# Altium PCB 004-H-01.PcbDoc
Units mm, origin at the board's own origin, x right, y up, seen from the top; angles counter-clockwise.
Board outline 101 x 61 mm, 2 copper layers (Top Layer, Bottom Layer), stack 1.621 mm thick; 86 components, 64 nets, 305 pads, 146 vias.
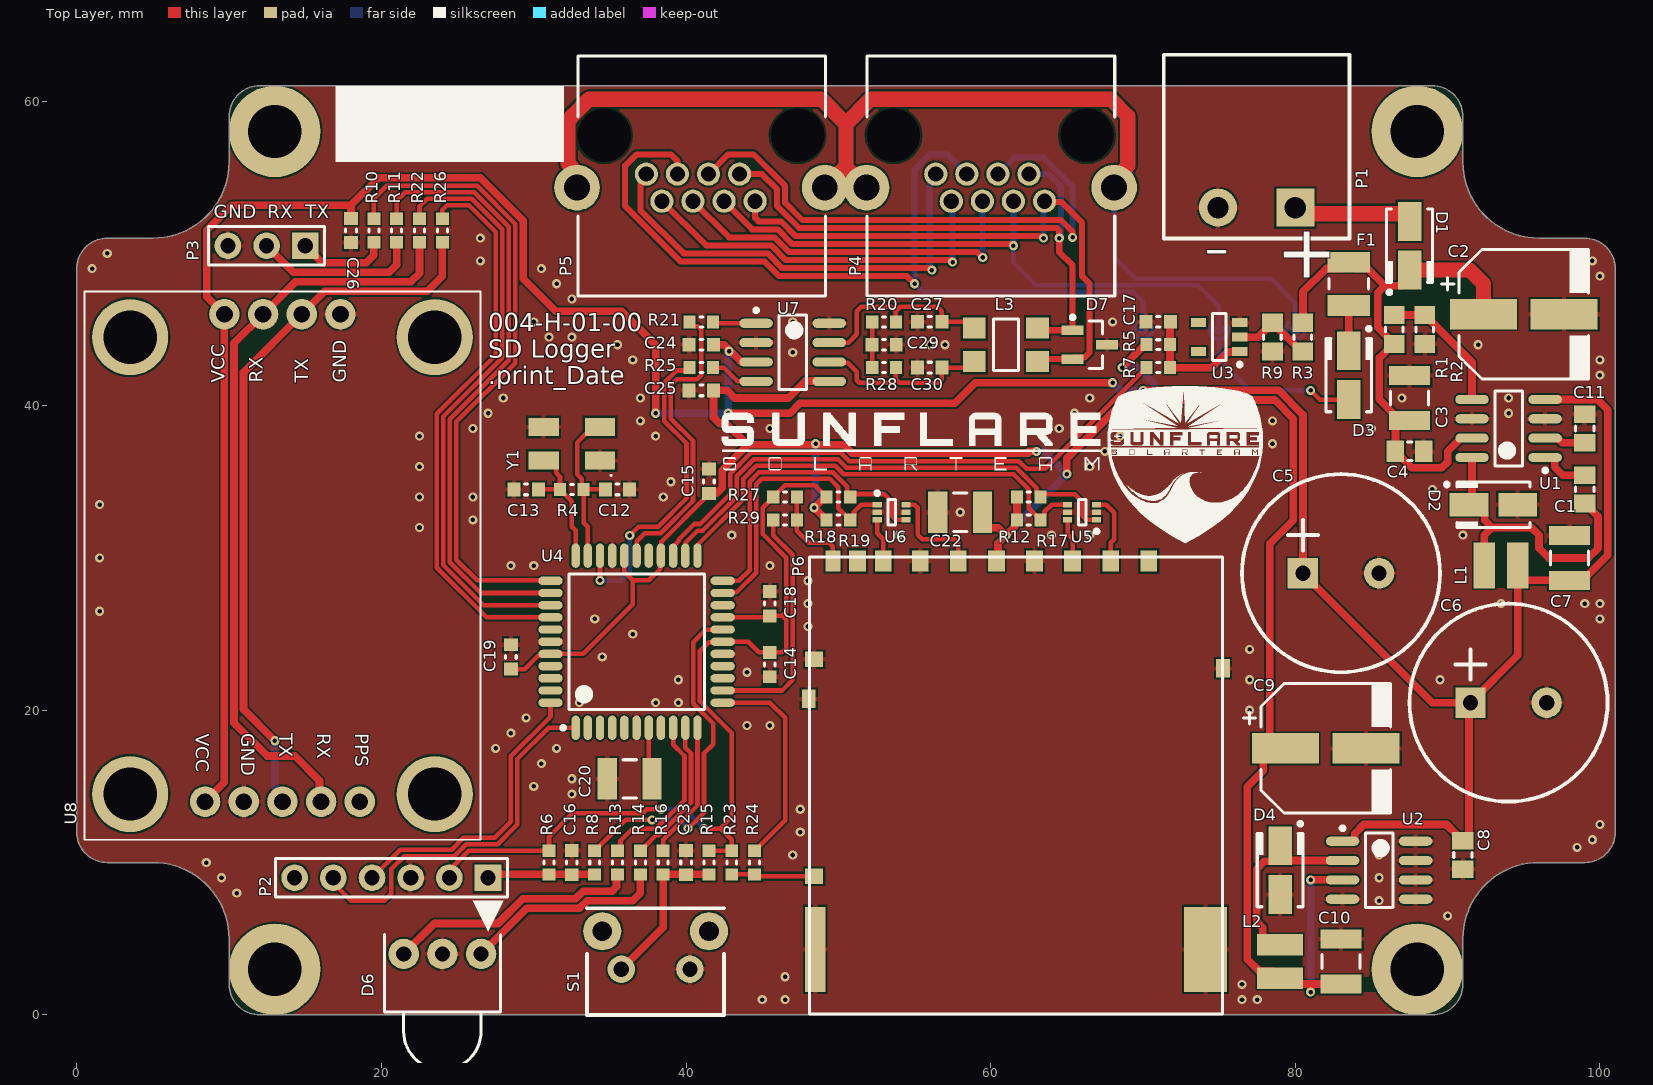
[diagram p0: Top Layer view]
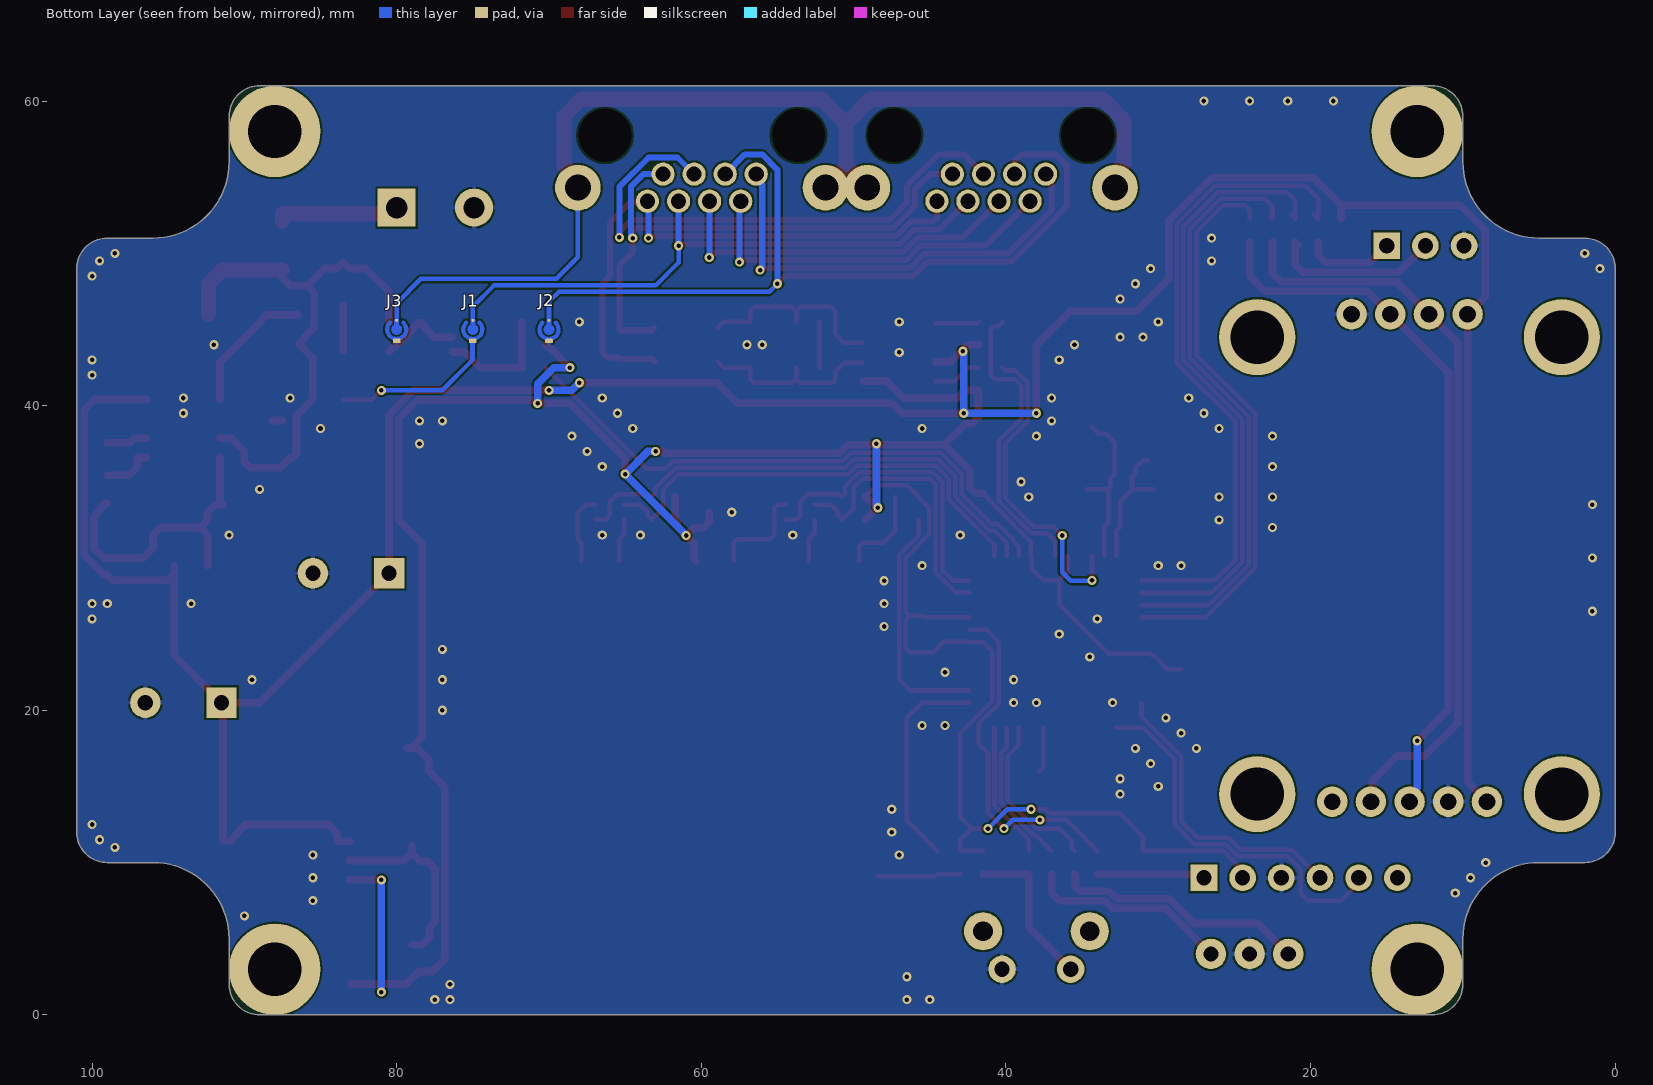
[diagram p1: Bottom Layer view, seen from below]

## Layer stack, top to bottom
Top Solder: solder mask 0.0102, Solder Resist, Dk 3.5
Top Layer: signal copper 0.0356
Dielectric 1: dielectric 1.55, FR-4, Dk 4.8
Bottom Layer: signal copper 0.0356
Bottom Solder: solder mask 0.0102, Solder Resist, Dk 3.5

## Board outline
5,10 cw(c5,5) 10,5 10,2 ccw(c12,2) 12,0 89,0 ccw(c89,2) 91,2 91,5 cw(c96,5) 96,10 99,10 ccw(c99,12) 101,12 101,49 ccw(c99,49) 99,51 96,51 cw(c96,56) 91,56 91,59 ccw(c89,59) 89,61 89,60.992 12.008,60.992 12,61 ccw(c12,59) 10,59 10,56 cw(c5,56) 5,51 2,51 ccw(c2,49) 0,49 0,12 ccw(c2,12) 2,10

## Design rules (kind name [scope] priority, off if disabled: settings)
Clearance [All] p1: gap=0.127 ignorepadtopadclearanceinfootprint=FALSE
HoleSize [All] p1: absolutevalues=TRUE maxlimit=6.3 minlimit=0.3 maxpercent=80.000 minpercent=20.000
MinimumSolderMaskSliver [All] p1: minsoldermaskwidth=0.127
PolygonConnect PolygonConnect_via [All vs IsVia] p1: connectstyle=Direct reliefconductorwidth=0.254 reliefentries=4 polygonreliefangle="90 Angle" airgapwidth=0.254
PolygonConnect [All] p2: connectstyle=Relief reliefconductorwidth=0.3 reliefentries=4 polygonreliefangle="90 Angle" airgapwidth=0.127
RoutingVias [All] p1: holewidth=0.3 width=0.6 viastyle="Through Hole" minholewidth=0.3 minwidth=0.6 maxholewidth=0.711 maxwidth=1.27
SilkToSilkClearance [All] p1 off: silktosilkclearance=0.254
SilkToSolderMaskClearance [IsPad] p1 off: minsilkscreentomaskgap=0.254 clearancetoexposedcopper=TRUE
SolderMaskExpansion [All] p1: expansion=0.102
UnRoutedNet [All] p1: checkbadconnections=TRUE
Width [All] p1: maxlimit=5 minlimit=0.127 preferedwidth=0.2
25 further rules are at their usual default settings.

## Components (designator, comment, footprint, x,y, rotation, side; value= is the part's Value field where it differs from the comment)
C1 "100nF" CAP0805 99,34.5 r90 top
C2 "68uF" CAPP8383X62N 95,46 r0 top
C3 "2.2uF" CAP1210 87.5,40.5 r270 top
C4 "100nF" CAP0805 87.5,37 r180 top
C5 "4700uF" CAPPOL_leaded_D12_5L20P5 83,29 r0 top
C6 "4700uF" CAPPOL_leaded_D12_5L20P5 94,20.5 r0 top
C7 "10uF" CAP1210 98,30 r270 top
C8 "100nF" CAP0805 91,10.5 r90 top
C9 "100uF" CAPP8383X62N 82,17.5 r0 top
C10 "10uF" CAP1210 83,3.5 r270 top
C11 "100nF" CAP0805 99,38.5 r270 top
C12 "33pF" CAP0603 35.5,34.5 r180 top
C13 "33pF" CAP0603 29.5,34.5 r0 top
C14 "100nF" CAP0603 45.5,23 r90 top
C15 "100nF" CAP0603 41.5,35.031 r270 top
C16 "100nF" CAP0603 32.5,10 r90 top
C17 "100nF" CAP0603 71,45.5 r180 top
C18 "100nF" CAP0603 45.5,27 r270 top
C19 "100nF" CAP0603 28.5,23.5 r270 top
C20 "10uF" CAP1210 36.3,15.5 r0 top
C22 "10uF" CAP1210 58,33 r0 top
C23 "100nF" CAP0603 40,10 r270 top
C24 "100nF" CAP0603 41,44 r0 top
C25 "100nF" CAP0603 41,41 r0 top
C26 "100nF" CAP0603 18,51.5 r90 top
C27 "47pF" CAP0603 56,45.5 r0 top
C29 "100nF" CAP0603 53,44 r180 top
C30 "47pF" CAP0603 56,42.5 r180 top
D1 "S2MA" DIODEDO-214AC 87.5,50.5 r90 top
D2 "HTA5U100" DIODEDO-214AC 93,33.5 r0 top
D3 "S2MA" DIODEDO-214AC 83.5,42 r270 top
D4 "HTA5U100" DIODEDO-214AC 79,9.5 r270 top
D6 "RG" LED_RG_COMMON_GND 24,4 r0 top
D7 "PESD1CAN" SOT23-3N 66.5,44 r0 top
F1 "PTC 250mA" Fuse1210 83.5,48 r90 top
J1 "Solder Jumper" SOLDERJUMER 75,45 r90 bottom
J2 "Solder Jumper" SOLDERJUMER 70,45 r90 bottom
J3 "Solder Jumper" SOLDERJUMER 80,45 r90 bottom
L1 "100uH" INDP3030X28N 93.5,29.5 r0 top
L2 "47uH" INDP3030X28N 79,3.5 r270 top
L3 "51uH" IND200P450X300-4N 61,44 r180 top
P1 "Header 2 way" 21.95MH/2-E 80,53 r180 top
P2 "Header 1X6" Header1X6P100 27,9 r180 top
P3 "Header 1X3" Header1X3P100 15,50.5 r180 top
P4 "Header 1X8 G" TECO-1-406541-5 60,63 r180 top
P5 "Header 1X8 G" TECO-1-406541-5 41,63 r180 top
P6 "SD Card" SDK-9BNS-K13-GS-TB 61,30.5 r0 top
R1 "100K" RES0805 86.5,45 r90 top
R2 "39K" RES0805 88.5,45 r270 top
R3 "105K" RES0805 80.5,44.5 r270 top
R4 "1M0" RES0603 32.5,34.5 r180 top
R5 "10K" RES0603 71,44 r0 top
R6 "10K" RES0603 31,10 r270 top
R7 "1K0" RES0603 71,42.5 r180 top
R8 "470R" RES0603 34,10 r270 top
R9 "13K3" RES0805 78.5,44.5 r270 top
R10 "1K0" RES0603 19.5,51.5 r270 top
R11 "1K0" RES0603 21,51.5 r270 top
R12 "10K" RES0603 62.5,34 r0 top
R13 "820R" RES0603 35.5,10 r270 top
R14 "820R" RES0603 37,10 r270 top
R15 "10K" RES0603 41.5,10 r270 top
R16 "1K0" RES0603 38.5,10 r270 top
R17 "10K" RES0603 62.5,32.5 r0 top
R18 "10K" RES0603 50,34 r0 top
R19 "10K" RES0603 50,32.5 r0 top
R20 "15K" RES0603 53,45.5 r180 top
R21 "470R" RES0603 41,45.5 r180 top
R22 "1K0" RES0603 22.5,51.5 r270 top
R23 "10K" RES0603 43,10 r270 top
R24 "1K0" RES0603 44.5,10 r90 top
R25 "470R" RES0603 41,42.5 r180 top
R26 "1K0" RES0603 24,51.5 r270 top
R27 "10K" RES0603 46.5,34 r0 top
R28 "15K" RES0603 53,42.5 r0 top
R29 "1K0" RES0603 46.5,32.5 r180 top
S1 "Switch" FSMRA4JH 38,3 r0 top
U1 "MAX5035B" SOIC-8N 94,38.5 r180 top
U2 "AP1509-33" SOIC-8N 85.5,9.5 r0 top
U3 "BU4809G" SOT95P280X125-5N 75,44.5 r180 top
U4 "DSPIC33EP128GS804" TQFP80P1200X1200X120-44N 36.75,24.5 r90 top
U5 "NUF2230XV6" SOT50P160X60-6N 66,33 r180 top
U6 "NUF2230XV6" SOT50P160X60-6N 53.5,33 r0 top
U7 "MCP2562" SOIC-8N 47,43.5 r0 top
U8 "GY-GPS6MV2" GY-GPS6MV2 13.5,47.5 r0 top
Y1 "16MHz" "CrystalSMD 5032" 32.5,37.5 r180 top

## Footprints (in the part's own frame and the unit in brackets; to place one, negate y for a bottom-side part, rotate by r counter-clockwise, add the part's x,y. Pads: shape width x height; smd on the part's side, far side on the other; paste and mask are expansions set on the pad)
21.95MH/2-E [mm] "Terminal Block, Horizontal, Header, 5.08 mm, 2 Ways"
  rect 2.5x2.5 hole 1.4: 1(0,0)
  round 2.5 hole 1.4: 2(5.08,0)
  silkscreen extent -3.56,-10.03 8.64,2.03, body extent -3.54,-10 8.62,2, height 8.6
CAP0603 [mm] "Chip Capacitor 0603"
  rect 0.85x0.9 smd: 1(-0.8,0) 2(0.8,0)
  silkscreen extent -0.1,-0.35 0.1,0.35, body extent -0.83,-0.43 0.82,0.42, height 0.6
CAP0805 [mm] "Chip Capacitor, 2-Leads, Body 2.0x1.3mm, IPC Medium Density"
  rect 1.15x1.4 smd: 1(-0.925,0) 2(0.925,0)
  silkscreen extent -0.15,-0.6 0.15,0.6, body extent -1.1,-0.67 1.1,0.67, height 0.95
CAP1210 [mm] "Chip Capacitor, 2-Leads, Body 3.2x2.5mm, IPC Medium Density"
  rect 1.25x2.7 smd: 1(-1.475,0) 2(1.475,0)
  silkscreen extent -0.45,-1.25 0.45,1.25, body extent -1.7,-1.35 1.7,1.35, height 1.3
CAPP8383X62N [mm] "Capacitor SMD, 2-Leads, Body 8.3x8.3mm, IPC Medium Density"
  rect 4.4x2 smd: 1(-2.65,0) 2(2.65,0)
  silkscreen extent -5.4,-4.25 4.25,4.25, body extent -4.25,-4.25 4.25,4.25, height 6.2
CAPPOL_leaded_D12_5L20P5 [mm]
  rect 2x2 hole 1: 1(-2.5,0)
  round 2 hole 1: 2(2.5,0)
  silkscreen extent -6.5,-6.5 6.5,6.5, body extent -6.25,-6.25 6.25,6.25, height 20
"CrystalSMD 5032" [mm] "DFN, 4-Leads, Body 3.20x5.00mm, Pitch 3.80mm, IPC Medium Density"
  rect 2x1.2 smd: 1(-1.85,-1.1) 2(1.85,-1.1) 3(1.85,1.1) 4(-1.85,1.1)
  silkscreen extent -2.63,2.03 -2.53,2.12, body extent -2.58,-1.68 2.57,1.68, height 0.4
DIODEDO-214AC [mm] "Molded Diode, 2-Leads, Body 4.4x2.7mm, IPC Medium Density"
  rect 2.55x1.55 smd: 1(-1.6,0) 2(1.6,0)
  silkscreen extent -3.17,-1.5 2.4,1.5, body extent -2.5,-1.48 2.5,1.48, height 2.4
FSMRA4JH [mm] "Tactile switch side actuated"
  round 2.5 hole 1.3: 0(-3.505,2.49) 0(3.505,2.49)
  round 1.8 hole 1: 1(-2.25,0) 2(2.25,0)
  silkscreen extent -4.5,-3 4.5,4, body extent -4.2,-8.36 4.2,4, height 7
Fuse1210 [mm]
  rect 1.35x2.8 smd: 1(-1.425,0) 2(1.425,0)
  silkscreen extent -0.35,-1.3 0.35,1.3, body extent -1.72,-1.4 1.71,1.4, height 0.85
GY-GPS6MV2 [mm] "GPS module"
  round 5 hole 3.5: 0(-10,-33) 0(-10,-3) 0(10,-33) 0(10,-3)
  round 2 hole 1.1: 1(-5.08,-33.5) 1(-3.81,-1.5) 2(-1.27,-1.5) 2(2.54,-33.5) 3(0,-33.5) 3(1.27,-1.5) 4(-2.54,-33.5) 4(3.81,-1.5) 5(5.08,-33.5)
  silkscreen extent -13,-36 13,0
Header1X3P100 [mm] "Header 1X3, 100mil pitch"
  rect 1.75x1.75 hole 1: 1(0,0)
  round 1.75 hole 1: 2(2.54,0) 3(5.08,0)
  silkscreen extent -1.27,-1.27 6.35,1.27, body extent -1.27,-1.27 6.35,1.27, height 9
Header1X6P100 [mm] "Header 1X6, 100mil pitch"
  rect 1.75x1.75 hole 1: 1(0,0)
  round 1.75 hole 1: 2(2.54,0) 3(5.08,0) 4(7.62,0) 5(10.16,0) 6(12.7,0)
  silkscreen extent -1.27,-1.27 13.97,1.27, body extent -1.27,-1.27 13.97,1.27, height 9
IND200P450X300-4N [mm] "IND, 4-Leads, Body 3.4x4.7mm (max), Pitch 2.00mm, IPC Medium Density"
  rect 1.5x1.4 smd: 1(-2.075,1.1) 2(2.075,1.1) 3(2.075,-1.1) 4(-2.075,-1.1)
  silkscreen extent -0.82,-1.7 0.82,1.7, body extent -2.35,-1.7 2.35,1.7, height 3
INDP3030X28N [mm] "Precision Wire Wound Inductor, 2-Leads, Body 3,00x3,00mm, IPC Medium Density"
  rect 1.4x3 smd: 1(-1.1,0) 2(1.1,0)
  body extent -1.5,-1.49 1.5,1.49, height 3
LED_RG_COMMON_GND [mm]
  round 2 hole 1: 1(-2.54,0) 2(0,0) 3(2.54,0)
  silkscreen extent -3.81,-7.62 3.81,1.27
RES0603 [mm] "Chip Resistor 0603"
  rect 0.8x0.85 smd: 1(-0.775,0) 2(0.775,0)
  silkscreen extent -0.1,-0.33 0.1,0.33, body extent -0.82,-0.43 0.82,0.43, height 0.6
RES0805 [mm] "Chip Resistor, 2-Leads, Body 2.0x1.3mm, IPC Medium Density"
  rect 1.2x1.35 smd: 1(-0.95,0) 2(0.95,0)
  silkscreen extent -0.15,-0.58 0.15,0.58, body extent -1.1,-0.67 1.1,0.67, height 0.7
SDK-9BNS-K13-GS-TB [mm] "Memory Socket SD card"
  rect 1.1x1.4 smd: 1(6.875,-0.7) 2(4.375,-0.7) 3(1.875,-0.7) 4(-0.625,-0.7) 5(-3.125,-0.7) 6(-5.625,-0.7) 7(-8.05,-0.7) 8(-9.75,-0.7) 9(9.375,-0.7)
  rect 1x1.4 smd: 10(-11.355,-0.7)
  rect 1.2x1 smd: 11(-12.595,-21.4) 12(-12.595,-7.15)
  rect 0.9x1.2 smd: 12(-12.945,-9.75) 12(14.255,-7.75)
  rect 1.35x5.6 smd: 12(-12.52,-26.2)
  rect 2.8x5.6 smd: 12(13.105,-26.2)
  silkscreen extent -12.9,-30.45 14.21,-0.45, body extent -12.85,-30.4 14.25,-0.4, height 2.95
SOIC-8N [mm] "SOIC, 8-Leads, Body 4.9x3.9mm (max), Pitch 1.27mm, IPC Medium Density"
  oval 2.2x0.6 smd: 1(-2.4,1.905) 2(-2.4,0.635) 3(-2.4,-0.635) 4(-2.4,-1.905) 5(2.4,-1.905) 6(2.4,-0.635) 7(2.4,0.635) 8(2.4,1.905)
  silkscreen extent -2.53,-2.45 0.9,2.88, body extent -3,-2.45 3,2.45, height 1.75
SOLDERJUMER [mm] "Solder jumper open"
  round 0.2 smd paste+0 mask+0: 1(0.6,0)
  rrect50% 0.3x0.5 smd paste+0 mask+0: 2(-0.75,0)
  Top Layer region: 0.316,-0.15 0.208,-0.281 0.051,-0.346 -0.118,-0.329 -0.259,-0.235 -0.34,-0.085 -0.34,0.085 -0.259,0.235 -0.118,0.329 0.051,0.346 0.208,0.281 0.316,0.15 0.316,0.15 0.316,0.15 0.6,0.15 0.665,0.135 0.717,0.094 0.746,0.033 0.746,-0.033 0.717,-0.094 0.665,-0.135 0.6,-0.15 0.6,-0.15
  Top Layer region: 0.53,-0.53 0.232,-0.713 -0.117,-0.741 -0.441,-0.607 -0.668,-0.34 -0.75,0 -0.668,0.34 -0.441,0.607 -0.117,0.741 0.232,0.713 0.53,0.53 0.53,0.53 0.56,0.483 0.566,0.428 0.548,0.375 0.508,0.336 0.456,0.318 0.401,0.324 0.354,0.354 0.354,0.354 0.155,0.476 -0.078,0.494 -0.294,0.405 -0.446,0.227 -0.5,0 -0.446,-0.227 -0.294,-0.405 -0.078,-0.494 0.155,-0.476 0.354,-0.354 0.354,-0.354 0.401,-0.324 0.456,-0.318 0.508,-0.336 0.548,-0.375 0.566,-0.428 0.56,-0.483 0.53,-0.53
SOT23-3N [mm] "SOT23, 3-Leads, Body 3.1x3.0mm (max), Pitch 0.95mm, IPC Medium Density"
  rect 1.45x0.6 smd: 1(-1.125,0.95) 2(-1.125,-0.95) 3(1.125,0)
  silkscreen extent -1.25,-1.55 0.85,1.92, body extent -1.25,-1.55 1.25,1.55, height 1.45
SOT50P160X60-6N [mm] "SOT23, 6-Leads, Body 1.60x1.60mm, Pitch 0.50mm, IPC Medium Density"
  rect 0.6x0.35 smd: 1(-0.95,0.5) 2(-0.95,0) 3(-0.95,-0.5) 4(0.95,-0.5) 5(0.95,0) 6(0.95,0.5)
  silkscreen extent -1.08,-0.85 0.25,1.37, body extent -0.65,-0.85 0.65,0.85, height 0.6
SOT95P280X125-5N [mm] "SOT23, 5-Leads, Body 2.90x2.80mm, Pitch 0.95mm, IPC Medium Density"
  rect 1x0.6 smd: 1(-1.35,0.95) 2(-1.35,0) 3(-1.35,-0.95) 4(1.35,-0.95) 5(1.35,0.95)
  silkscreen extent -1.48,-1.55 0.45,1.92, body extent -0.85,-1.55 0.85,1.55, height 1.25
TECO-1-406541-5 [mm] "MODULAR, JACK, THT, R/A, RJ45, 8P8C"
  round 0 hole 3.5 unplated: 0(-6.323,5.258) 0(6.377,5.258)
  round 1.524 hole 1: 1(3.607,7.798) 2(2.587,9.578) 3(1.567,7.798) 4(0.547,9.578) 5(-0.473,7.798) 6(-1.493,9.578) 7(-2.513,7.798) 8(-3.533,9.578)
  round 3 hole 1.7: 9(-8.103,8.688) 9(8.157,8.688)
  silkscreen extent -8.14,0.05 8.11,15.8, body extent -8.13,0 8.13,15.75, height 13.4
TQFP80P1200X1200X120-44N [mm] "TQFP, 44-Leads, Body 12.0x12.0mm (max), Pitch 0.80mm, IPC Medium Density"
  oval 1.6x0.55 smd: 1(-5.65,4) 2(-5.65,3.2) 3(-5.65,2.4) 4(-5.65,1.6) 5(-5.65,0.8) 6(-5.65,0) 7(-5.65,-0.8) 8(-5.65,-1.6) 9(-5.65,-2.4) 10(-5.65,-3.2) 11(-5.65,-4) 23(5.65,-4) 24(5.65,-3.2) 25(5.65,-2.4) 26(5.65,-1.6) 27(5.65,-0.8) 28(5.65,0) 29(5.65,0.8) 30(5.65,1.6) 31(5.65,2.4) 32(5.65,3.2) 33(5.65,4)
  oval 0.55x1.6 smd: 12(-4,-5.65) 13(-3.2,-5.65) 14(-2.4,-5.65) 15(-1.6,-5.65) 16(-0.8,-5.65) 17(0,-5.65) 18(0.8,-5.65) 19(1.6,-5.65) 20(2.4,-5.65) 21(3.2,-5.65) 22(4,-5.65) 34(4,5.65) 35(3.2,5.65) 36(2.4,5.65) 37(1.6,5.65) 38(0.8,5.65) 39(0,5.65) 40(-0.8,5.65) 41(-1.6,5.65) 42(-2.4,5.65) 43(-3.2,5.65) 44(-4,5.65)
  silkscreen extent -5.77,-4.45 4.45,4.95, body extent -5,-5 5,5, height 1.2

## Part data
C1 C4 C8 C11: library part Capacitor, "Capacitor", Dielectric=X7R, Manufacturer=-, VoltageRating=100V, Farnell Ordercode=-, Manufacturer Part No=-, Price=0.00
C2: library part CapacitorPol, "Capacitor Pol", Dielectric=ELCO, Manufacturer=Panasonic, Manufacturer Part No=EEEFK1J680UP, VoltageRating=63V, Farnell Ordercode=1850126, Price=0.70
C3: library part Capacitor, "Capacitor", Dielectric=X7R, Manufacturer=AVX, Manufacturer Part No=C1210X225K1RACTU, VoltageRating=100V, Farnell Ordercode=2820988, Price=0.98
C5 C6: library part CapacitorPol, "Capacitor Pol", Dielectric=ELCO, Manufacturer=Panasonic, Manufacturer Part No=ECA0JM472, VoltageRating=6.3V, Farnell Ordercode=1848486, Price=0.73
C7 C10 C20 C22: library part Capacitor, "Capacitor", Dielectric=X5R, Manufacturer=Multicomp, Manufacturer Part No=MC1210X106K160CT, VoltageRating=16V, Farnell Ordercode=1759465, Price=0.50
C9: library part CapacitorPol, "Capacitor Pol", Dielectric=ELCO, Manufacturer=Panasonic, Manufacturer Part No=EEEHA1A101P, VoltageRating=10V, Farnell Ordercode=1973295, Price=0.11
C12 C13: library part Capacitor, "Capacitor", Dielectric=C0G, Manufacturer=-, VoltageRating=100V, Farnell Ordercode=-, Manufacturer Part No=-, Price=0.00
C14 C15 C17 C18 C19 C23 C24 C25 C26 C29: library part Capacitor, "Capacitor", Dielectric=X7R, Manufacturer=-, VoltageRating=50V, Farnell Ordercode=-, Manufacturer Part No=-, Price=0.00
C16: library part Capacitor, "Capacitor", Dielectric=X7R, Manufacturer=-, VoltageRating=16V, Farnell Ordercode=-, Manufacturer Part No=-, Price=0.00
C27 C30: library part Capacitor, "Capacitor", Dielectric=C0G, Manufacturer=-, VoltageRating=50V, Farnell Ordercode=-, Manufacturer Part No=-, Price=0.00
D1 D3: library part Diode, "Diode", Manufacturer=Multicomp, Farnell Ordercode=2675071, Manufacturer Part No=S2MA, Price=0.13
D2 D4: library part "Diode Schottky", "Diode Schottky", Manufacturer=Multicomp, Farnell Ordercode=2750942, Manufacturer Part No=HTA5U100, Price=0.46
D6: library part Led_RG_Common_GND, "Led RG", Manufacturer=Multicomp, Manufacturer Part No=MCL039PURGW, Farnell Ordercode=1581194, Price=0.21
D7: "ESD Protection Device, TVS, 70 V, SOT-23, 3 Pins", Manufacturer=NXP, Farnell Ordercode=1510703, Manufacturer Part No=PESD1CAN, Price=0.13
F1: library part Fuse, "Fuse", Manufacturer="Bel Fuse", Manufacturer Part No=0ZCH0010FF2E, Farnell Ordercode=2834897, Price=0.15
J1 J2 J3: library part SolderJumper, "Solder jumper open", Manufacturer=-, Farnell Ordercode=-, Manufacturer Part No=-, Price=0.00
L1: library part Inductor, "Inductor", Manufacturer=BOURNS, Manufacturer Part No=SDR0302-101KL, Farnell Ordercode=2212477, Price=0.408
L2: library part Inductor, "Inductor", Manufacturer=Bourns, Manufacturer Part No=SDR0302-470KL, Farnell Ordercode=2328694, Price=0.403
L3: library part "Choke Common Mode", "Choke common mode", Manufacturer=Bourns, Manufacturer Part No=SRF4532-510Y, Farnell Ordercode=2859108, Price=0.47
P1: library part Header1X2, Manufacturer="IMO PRECISION CONTROLS", Manufacturer Part No=21.95MH/2-E, Farnell Ordercode=2517885, Price=0.153
P2: library part Header1X6, "Connector 1X6", Manufacturer=Multicomp, Manufacturer Part No=2211S-06G, Farnell Ordercode=1593415, Price=0.04
P3: library part Header1X3, "Connector 1X3", Manufacturer=Multicomp, Manufacturer Part No=2211S-03G, Farnell Ordercode=1593412, Price=0.02
P4 P5: library part Header1X8+G, "Connector 1X8 with Ground", Manufacturer="TE CONNECTIVITY", Manufacturer Part No=1-406541-5, Farnell Ordercode=-, Price=0.00
P6: library part "SD slot", "SD slot connector with card detect and protect", Manufacturer=JST, Manufacturer Part No=SDK-9BNS-K13-GS-TB, Farnell Ordercode=2469853, Price=1.46
R1 R2 R3 R4 R5 R6 R7 R8 R9 R10 R11 R12 R13 R14 R15 R16 R17 R18 R19 R20 R21 R22 R23 R24 R25 R26 R27 R28 R29: library part Resistor, "Resistor", Manufacturer=-, Tolerance=1%, Farnell Ordercode=-, Manufacturer Part No=-, Price=0.00
S1: library part TactileSwitch, "Tactile Switch", Manufacturer=1555988, Manufacturer Part No=FSMRA4JH, Farnell Ordercode="TE CONNECTIVITY", Price=0.14
U1: "5V 1A, 76V, High-Efficiency MAXPower Step-Down DC-DC Converter", Manufacturer="Maxim Integrated Products", Manufacturer Part No=MAX5035BUSA+T, Farnell Ordercode=2799102, Price=3.26
U2: "150KHz, 2A PWM BUCK DC/DC CONVERTER", Manufacturer="Diodes Inc", Manufacturer Part No=AP1509-33SG-13, Farnell Ordercode=1825322, Price=0.75
U3: library part BD48xx, "Voltage Detector", Manufacturer=ROHM, Manufacturer Part No=BU4809G-TR, Farnell Ordercode=2342983, Price=0.12
U4: "16-Bit Digital Signal Controllers fo  r Digital Power Applications with   Interconnected High-Speed PWM, ADC, PGA and Comparators", Manufacturer=Microchip, Manufacturer Part No=DSPIC33EP128GS804-I/PT, Farnell Ordercode=2706170, Price=4.44
U5 U6: "2 Line EMI Filter with ESDProtection", Manufacturer="ON SEMICONDUCTOR", Manufacturer Part No=NUF2230XV6T1G, Farnell Ordercode=2774598, Price=0.22
U7: "CAN Bus, Transceiver, CAN, LIN, 1, 1, 4.5 V, 5.5 V, SOIC", Manufacturer=Microchip, Manufacturer Part No=MCP2562-E/SN, Farnell Ordercode=2362839, Price=0.79
U8: "GPS module", Manufacturer=Ebay, Manufacturer Part No=GY-NEO6MV2, Farnell Ordercode=-, Price=5.00
Y1: library part Crystal_1, "Crystal", Manufacturer=MULTICOMP, Manufacturer Part No=MCSJK-7I-16.00-18-30-60-B-30, Farnell Ordercode=2854045, Price=0.27

## Free pads (board coordinates)
  round 6 hole 3.5: 0(13,3) 0(13,58) 0(88,3) 0(88,58)

## Via types
v1: diameter 0.6, hole 0.3, Top Layer to Bottom Layer, tented both sides, 146 vias

## Nets (pads, with @x,y where several pads share a name; then routed paths per layer and width w, separated by ;. In a path a pad name is that pad's centre, name@x,y a point inside that pad or via, vN(x,y) a via of type N, cw(c..) or ccw(c..) an arc to the next point about the centre after c; other vN are vias at no path point)
3.3V: C9.1 C10.2 C14.2 C15.2 C18.2 C19.2 C22.2 C25.2 L2.2 P2.2 P6.4 R5.1 R6.1 R12.1 R15.1 R17.1 R18.1 R19.1 R23.1 R27.1 U2.3 U4.17 U4.19 U4.26 U4.29 U4.40 U7.5 | length 221.7
  Top Layer w0.3: P2.2@24.46,9.5 25.735,10.775 R6.1 31,11.7 32.533,13.233 37.158,13.233 37.425,13.5 v1(38.342,13.5) ; C19.2 29.4,22.7 30.275,23.575 30.382,23.575 30.507,23.7 U4.40 33.24,23.7 36.5,26.96 36.5,28.525 ; U4.29 35.95,29.075 36.5,28.525 ; v1(41.177,12.229) 42.229,12.229 ; R15.1 R23.1 43,11.5 42.271,12.229 42.229,12.229 ; C15.2 41.475,34.231 41.2,33.956 41.2,33.882 38.384,31.066 38.384,30.184 U4.26 38.302,30.102 38.302,29.275 37.552,28.525 36.5,28.525 ; U4.19 45.4,26.1 C18.2 46.325,26.2 ; R18.1 49.225,34.025 48.975,34.275 48.95,34.275 48.453,34.772 46.497,34.772 46,34.275 45.975,34.275 45.725,34.025 R27.1 45.725,33.975 45.475,33.725 45.45,33.725 45.027,33.302 45.027,31.569 46.573,30.023 46.573,26.448 46.325,26.2 ; 42.229,12.229 43,13 43,18.51 40.902,20.608 40.902,23.879 41.486,24.463 42.363,24.463 U4.17 44.075,24.5 44.775,23.8 C14.2 46.324,23.8 46.573,24.049 46.573,25.952 46.325,26.2
  Top Layer w0.5: C15.2 41.519,34.25 42,34.25 42.365,34.615 42.365,35.758 44.041,37.434 ; C25.2@41.8,40.975 41.8,39.223 42.2,38.823 42.652,38.823 44.041,37.434 ; C25.2 42.697,41 43.197,40.5 46.7,40.5 47.814,41.614 49.381,41.614 U7.5 ; v1(48.5,37.5) 48.473,37.5 v1@48.407,37.434 ; R19.1 49.225,32.525 49.075,32.675 49.05,32.675 48.425,33.3 v1(48.405,33.3) 48.93,33.825 49.075,33.825 49.225,33.975 R18.1 ; C22.2 59.475,32.357 59.85,31.982 60.493,31.982 v1(61,31.475) ; P6.4 60.482,29.907 60.482,30.957 v1(61,31.475) ; R12.1 R17.1 61.575,32.35 61.575,32.05 v1(61,31.475) ; 62.477,36.881 62.381,36.881 ; v1(63,37) 62.5,37 62.381,36.881 ; v1(65,35.5) 65,36.53 68.62,40.15 v1(70.75,40.15) 70.973,40.373 78.64,40.373 79.873,39.14 79.873,32.475 78.32,30.922 78.32,18.25 C9.1@79.07,17.5 ; v1(68.625,42.5) 69.95,43.825 70.075,43.825 70.225,43.975 R5.1 ; C9.1 C9.1@79.07,17.5 ; v1(81,1.5) 81,2.025 ; v1(81,8.865) U2.3 ; C10.2 81,2.025 ; 44.041,37.434 v1@48.407,37.434 ; v1@48.407,37.434 50.372,37.434 50.925,36.881 62.381,36.881 ; C9.1@79.07,17.5 78.643,17.5 77.893,16.75 77.893,16.043 76.837,14.987 76.837,3.663 77.65,2.85 78.55,2.85 L2.2 79.375,2.025 81,2.025
  Bottom Layer w0.3: v1(38.342,13.5) 39.906,13.5 v1(41.177,12.229)
  Bottom Layer w0.5: v1(48.405,33.3) 48.5,33.395 v1(48.5,37.5) ; v1(61,31.475) 61,31.5 v1(65,35.5) 63.5,37 v1(63,37) ; v1(68.625,42.5) 69.675,42.5 70.75,41.425 v1(70.75,40.15) ; v1(81,1.5) v1(81,8.865)
5V: C5.1 C6.1 C7.2 C8.2 C24.2 C26.2 L1.2 U1.4 U2.1 U7.3 U8.1 | length 207.6
  Top Layer w0.5: U8.1@8.42,14 9.69,15.27 9.69,46 8.536,47.154 8.536,51.5 10.182,53.146 18,53.146 ; C26.2 18,53.146 ; v1(38,39.5) 38,43.98 35.774,46.206 31.444,46.206 29.308,48.342 29.308,52.145 26.499,54.954 19.808,54.954 18,53.146 ; C24.2 42.493,44 43.609,42.884 44.581,42.884 U7.3 ; v1(42.771,39.5) 46.825,39.5 47.475,40.15 57.65,40.15 59,41.5 v1(68,41.5) ; v1(70,41) 78.9,41 80.5,39.4 C5.1 89,20.5 C6.1 ; U2.1 83.849,11.405 83.895,11.451 83.895,11.895 84.5,12.5 89.925,12.5 90.55,11.875 90.55,11.75 90.875,11.425 C8.2 91.4,11.425 91.4,20.4 C6.1 ; L1.2 L1.2@94.6,28.975 ; U1.4 99.828,40.405 100.5,39.733 100.5,30.172 99.228,28.9 99.018,28.9 98.643,28.525 C7.2 95.05,28.525 L1.2@94.6,28.975 ; C6.1 94.6,23.6 L1.2@94.6,28.975
  Bottom Layer w0.5: v1(38,39.5) v1(42.771,39.5) 42.771,43.517 v1(42.829,43.575) ; v1(68,41.5) 68.5,41 v1(70,41)
CAN_+: J1.1 P4.6 P5.6 | length 39.8
  Top Layer w0.4: P5.6 44.342,51.573 46.014,51.573 46.979,50.608 61.385,50.608 v1(61.493,50.5)
  Bottom Layer w0.3: v1(61.493,50.5) 61.493,49.398 63,47.891 73.609,47.891 75,46.5 J1.1
  Bottom Layer w0.4: v1(61.493,50.5) P4.6
CAN_-: J2.1 P4.3 P5.3 | length 57.2
  Top Layer w0.4: P5.3 39.433,56.067 39,56.5 36.75,56.5 36,55.75 36,53.097 39.632,49.465 45.141,49.465 46.106,48.5 54.5,48.5 v1(55,48)
  Bottom Layer w0.3: v1(55,48) 55.536,47.464 69.369,47.464 70,46.834 J2.1
  Bottom Layer w0.4: v1(55,48) 55,55.5 56,56.5 57.135,56.5 P4.3
CAN_H: D7.1 L3.4 P4.7 P5.7 | length 38.3
  Top Layer w0.4: P5.7 44.98,55.202 45.973,54.209 45.973,53.105 47.416,51.662 64.338,51.662 64.5,51.5 v1(64.5,51) 64.5,50.081 65.375,49.206 D7.1 63.225,44.95 L3.4
  Bottom Layer w0.4: P4.7 63.798,55.202 64.622,54.378 64.622,51.122 v1(64.5,51)
CAN_L: D7.2 L3.1 P4.8 P5.8 | length 38.5
  Top Layer w0.4: P5.8 44.533,52.334 44.767,52.1 46.233,52.1 47.198,51.135 63.334,51.135 v1(63.469,51) ; L3.1 63.225,43.05 D7.2 65.475,43.15 66.15,43.15 66.5,43.5 66.5,48 66,48.5 66,50.782 66.002,50.784 66.002,51.306 66,51.308 66,52 64.619,53.381 63.574,53.381 P4.8
  Bottom Layer w0.4: v1(63.469,51) 63.469,53.358 P4.8
CAN_RX: R25.2 U4.31 | length 21.2
  Top Layer w0.3: v1(34.35,28.525) U4.31 ; v1(36.3,31.475) 36.88,32.055 38.165,32.055 40.026,33.916 40.026,37.52 38.573,38.973 38.573,39.257 38.577,39.261 38.577,39.739 38.573,39.743 38.573,41.501 39.379,42.307 40.032,42.307 R25.2
  Bottom Layer w0.3: v1(34.35,28.525) 34.375,28.5 35.75,28.5 36.3,29.05 v1(36.3,31.475)
CAN_SHIELD: J3.1 P4.9 P5.9 | length 74.2
  Top Layer w1: P5.9@32.843,54.312 32.46,54.695 32.46,55.684 32.246,55.898 32.246,58.727 32.5,58.981 32.5,59 33.619,60.119 48.881,60.119 50.5,58.5 ; P5.9@49.103,54.312 50.322,55.531 ; 50.473,55.682 50.775,55.38 50.775,55.078 51.541,54.312 P4.9@51.843,54.312 ; 50.5,55.898 50.5,58.5 ; P4.9@68.103,54.312 68.103,54.853 69,55.75 69,59 67.881,60.119 52.119,60.119 50.5,58.5
  Bottom Layer w0.3: P4.9@68.103,54.312 68.103,49.747 69.532,48.318 78.415,48.318 80,46.734 J3.1
CAN_TX: R21.2 U4.28 | length 20.2
  Top Layer w0.3: U4.28 36.75,31.103 37.275,31.628 38.342,31.628 40.453,33.739 40.453,37.697 39.004,39.146 39.004,39.916 39,39.92 39,41.324 39.403,41.727 40.727,41.727 41,42 41,45 40.775,45.225 40.475,45.225 40.225,45.475 R21.2
DEBUG_RX: R11.1 U4.35 | length 41.1
  Top Layer w0.3: R11.1@21.275,52.525 21.025,52.275 R11.1 21,53.447 21.553,54 26.104,54 28.354,51.75 28.354,42.971 24.491,39.107 24.491,29.717 26.508,27.7 U4.35
DEBUG_TX: R10.1 U4.34 | length 42.8
  Top Layer w0.3: R10.1@19.775,52.525 19.525,52.275 R10.1 19.487,52.288 19.487,53.573 20.341,54.427 26.281,54.427 28.781,51.927 28.781,42.794 24.918,38.931 24.918,29.894 26.287,28.525 31.075,28.525 U4.34
GND: C2.2 C3.1 C4.1 C5.2 C6.2 C7.1 C8.1 C9.2 C10.1 C11.1 C12.1 C13.1 C14.1 C15.1 C16.2 C17.2 C18.1 C19.1 C20.1 C22.1 C23.1 C24.1 C25.1 C26.1 C27.1 C29.1 C30.2 D2.2 D4.2 D6.2 D7.3 J2.2 J3.2 P1.2 P2.3 P3.3 P6.3 P6.6 P6.12 R2.2 R9.2 S1.2 U1.3 U1.6 U2.4 U2.5 U2.6 U2.7 U2.8 U3.3 U4.6 U4.16 U4.30 U4.39 U5.2 U5.5 U6.2 U6.5 U7.2 U7.8 U8.4 Y1.2 Y1.4
  other v1: 45,1 46.5,1 76.5,1 77.5,1 76.5,2 46.5,2.5 90,6.5 85.5,7.5 10.5,8 9.5,9 85.5,9 8.5,10 47,10.5 85.5,10.5 98.5,11 99.5,11.5 47.5,12 100,12.5 47.5,13.5 32.5,14.5 30,15 32.5,15.5 30.5,16.5 27.5,17.5 31.5,17.5 28.5,18.5 44,19 45.5,19 29.5,19.5 77,20 33,20.5 38,20.5 39.5,20.5 39.5,22 77,22 89.5,22 44,22.5 34.5,23.5 77,24 36.5,25 48,25.5 34,26 100,26 1.5,26.5 48,27 93.5,27 99,27 100,27 48,28.5 28.5,29.5 30,29.5 45.5,29.5 1.5,30 43,31.5 54,31.5 64,31.5 66.5,31.5 91,31.5 22.5,32 26,32.5 58,33 1.5,33.5 22.5,34 26,34 38.5,34 89,34.5 39,35 22.5,36 66.5,36 67.5,37 78.5,37.5 22.5,38 38,38 68.5,38 26,38.5 45.5,38.5 64.5,38.5 85,38.5 37,39 77,39 78.5,39 27,39.5 65.5,39.5 94,39.5 28,40.5 37,40.5 66.5,40.5 87,40.5 94,40.5 100,42 36.5,43 100,43 47,43.5 35.5,44 56,44 57,44 92,44 31,44.5 32.5,44.5 30,45.5 47,45.5 68,45.5 32.5,47 31.5,48 100,48.5 1,49 30.5,49 26.5,49.5 99.5,49.5 2,50 98.5,50 26.5,51 18.5,60 21.5,60 24,60 27,60
GPS_RX: R22.1 U4.36 | length 39.2
  Top Layer w0.3: R22.1@22.646,52.421 R22.1 22.5,53.073 23,53.573 25.927,53.573 27.927,51.573 27.927,43.147 24.064,39.284 24.064,29.54 26.704,26.9 U4.36
GPS_TX: R26.1 U4.37 | length 37.4
  Top Layer w0.3: R26.1@24.025,52.275 R26.1 24,52.842 24.304,53.146 25.75,53.146 27.5,51.396 27.5,43.324 23.637,39.461 23.637,29.363 26.9,26.1 U4.37
LED_G: R14.1 U4.10 | length 9.7
  Top Layer w0.3: R14.1 37.025,10.775 37.275,11.025 37.275,11.05 38.027,11.802 38.198,11.802 40.323,13.927 40.323,17.177 39.95,17.55 U4.10
LED_R: R13.1 U4.9 | length 11.1
  Top Layer w0.3: R13.1 35.693,10.968 35.693,11.443 36.479,12.229 38.021,12.229 39.896,14.104 39.896,17 39.15,17.746 U4.9
M\C\L\R\: R8.1 U4.18 | length 23
  Top Layer w0.3: R8.1 34.025,10.775 34.275,11.025 34.275,11.05 36.031,12.806 v1(37.775,12.806) ; v1(40.129,12.229) 41.177,13.277 41.177,17.177 41.775,17.775 41.775,19.131 40.475,20.431 40.475,24.475 41.3,25.3 U4.18
  Bottom Layer w0.3: v1(37.775,12.806) 39.552,12.806 v1(40.129,12.229)
NetC1_1: C1.1 D2.1 L1.1 U1.8 | length 20.2
  Top Layer w0.5: U1.8 91.6,33.7 D2.1 91.9,33.5 92.425,32.975 92.425,32.475 92.9,32 ; L1.1 92.4,31.5 92.9,32 ; C1.1 99.125,33.575 99.45,33.25 99.45,33.125 99.873,32.702 99.873,30.645 99.228,30 96.65,30 96,30.65 96,31.5 95.5,32 92.9,32
NetC1_2: C1.2 U1.1 | length 3.4
  Top Layer w0.5: U1.1 96.996,36.595 97.042,36.549 97.042,35.953 97.57,35.425 C1.2
NetC11_2: C11.2 U1.2 | length 2.7
  Top Layer w0.5: U1.2 97.227,37.865 97.517,37.575 C11.2
NetC12_2: C12.2 R4.1 U4.32 Y1.1 | length 11.1
  Top Layer w0.3: U4.32 33.55,32.042 33.275,32.317 R4.1 ; Y1.1 33.9,38.15 33.425,38.15 32.843,37.568 32.843,35.5 33.144,35.199 33.144,34.631 R4.1 ; C12.2 R4.1
NetC13_2: C13.2 R4.2 U4.33 Y1.3 | length 8.8
  Top Layer w0.3: C13.2 R4.2 ; Y1.3 31.018,36.4 31.468,35.95 31.468,35.582 31.725,35.325 R4.2 ; U4.33 32.75,31.805 32.5,32.055 32.5,33.725 32,34.225 31.975,34.225 31.725,34.475 R4.2
NetC16_1: C16.1 P2.1 R6.2 R8.2 | length 7.1
  Top Layer w0.5: P2.1@27,9.5 27.275,9.225 R6.2 32.5,9.225 R8.2
NetC17_1: C17.1 R5.2 R7.1 U3.1 | length 8
  Top Layer w0.5: C17.1 71.775,45.475 R5.2 R7.1 74.5,42.5 75.52,43.52 76.32,43.52 U3.1
NetC20_2: C20.2 U4.7 | length 2.9
  Top Layer w0.3: U4.7 37.55,16.225 C20.2@37.775,16
NetC23_2: C23.2 R15.2 R16.2 S1.1 | length 10.4
  Top Layer w0.5: S1.1 38.5,5.75 R16.2 R15.2
NetC27_2: C27.2 L3.3 R20.1 U7.7 | length 13.3
  Top Layer w0.3: U7.7 50.665,44.135 51.206,44.677 51.206,46.206 51.5,46.5 53.481,46.5 53.775,46.206 ; R20.1 53.775,46.206 ; L3.3 58.525,45.5 C27.2 56.8,46.206 56.506,46.5 54.069,46.5 53.775,46.206
NetC29_2: C29.2 R20.2 R28.1 | length 3
  Top Layer w0.3: R28.1 R20.2
NetC30_1: C30.1 L3.2 R28.2 U7.6 | length 12.4
  Top Layer w0.3: U7.6 49.447,42.818 50.614,42.818 51.206,42.225 51.206,41.676 51.382,41.5 53.548,41.5 53.775,41.727 ; R28.2 53.775,41.727 ; L3.2 58.525,42.5 C30.1 56.8,41.727 56.573,41.5 54.002,41.5 53.775,41.727
NetD1_2: D1.2 P1.1 | length 8.2
  Top Layer w1: P1.1 80.4,52.6 87.5,52.6 D1.2
NetD3_1: D3.1 F1.1 | length 3
  Top Layer w0.5: D3.1 F1.1
NetD3_2: D3.2 J1.2 | length 10.8
  Top Layer w0.3: v1(81,41) 81.6,40.4 D3.2
  Bottom Layer w0.3: J1.2 75.02,44.23 75.02,43 77.02,41 v1(81,41)
NetD4_1: D4.1 L2.1 U2.2 | length 12.8
  Top Layer w0.5: L2.1 78.32,4.6 77.87,5.05 77.87,5.73 77.464,6.136 77.464,9.564 77.975,10.075 78.475,10.075 79,10.6 D4.1@79,10.66 ; D4.1 D4.1@79,10.66 ; U2.2 79.525,10.135 D4.1@79,10.66
NetD6_1: D6.1 R13.2 | length 16.6
  Top Layer w0.5: D6.1 23.46,6 27.653,6 29.28,7.627 32.74,7.627 33.24,8.127 35.138,8.127 35.431,8.42 35.431,9.156 R13.2
NetD6_3: D6.3 R14.2 | length 13.3
  Top Layer w0.5: D6.3 29.54,7 33,7 33.5,7.5 36.5,7.5 37,8 R14.2
NetP3_1: P3.1 R10.2 | length 6
  Top Layer w0.5: P3.1 16.119,49.381 19,49.381 19.487,49.868 19.487,50.712 R10.2
NetP3_2: P3.2 R11.2 | length 11.2
  Top Layer w0.5: P3.2 14.206,48.754 20.5,48.754 21,49.254 R11.2 20.975,50.725 R11.2@20.825,50.575
NetP4_1: P4.1 P5.1 | length 29.8
  Top Layer w0.4: P5.1 37.393,54.898 37,54.505 37,52.842 39.85,49.992 45.359,49.992 46.324,49.027 56.016,49.027 v1(56.143,48.9)
  Bottom Layer w0.4: v1(56.143,48.9) 56.143,48.954 56,49.097 56,54.505 56.393,54.898 P4.1
NetP4_2: P4.2 P5.2 | length 24.9
  Top Layer w0.4: P5.2 41.316,50.519 45.578,50.519 46.543,49.554 57.5,49.554 v1(57.5,49.425)
  Bottom Layer w0.4: P4.2 57.5,53.335 v1(57.5,49.425)
NetP4_4: P4.4 P5.4 | length 24.3
  Top Layer w0.4: P5.4 42.829,51.046 45.796,51.046 46.761,50.081 59.119,50.081 v1(59.475,49.725)
  Bottom Layer w0.4: P4.4 59.453,49.747 v1(59.475,49.725)
NetP4_5: P4.5 P5.5 | length 37
  Top Layer w0.4: P5.5 42.771,56.5 44.427,56.5 46.5,54.427 46.5,53.323 47.634,52.189 64.615,52.189 65.375,51.429 v1(65.375,51.046)
  Bottom Layer w0.4: P4.5 61.562,56.291 63.454,56.291 65.375,54.37 v1(65.375,51.046)
NetP6_1: P6.1 U5.3 | length 4.6
  Top Layer w0.3: U5.3 67.578,33.5 68.103,32.975 68.103,31.228 67.875,31 P6.1
NetP6_2: P6.2 U5.6 | length 2.8
  Top Layer w0.3: U5.6 65.05,31.553 65.375,31.228 P6.2
NetP6_5: P6.5 U6.6 | length 6.7
  Top Layer w0.3: U6.6 55,33.5 55.2,33.3 55.2,31.528 55.5,31.228 57.647,31.228 57.875,31 P6.5
NetP6_7: P6.7 U6.3 | length 2.9
  Top Layer w0.3: U6.3 52.55,31.628 52.95,31.228 P6.7
NetP6_10: P6.10 R27.2 R29.1 | length 6
  Top Layer w0.3: R27.2 R29.1 47.275,31.78 48.055,31 49.4,31 49.626,30.774 49.626,29.819 P6.10
NetP6_11: P6.11 R23.2 R24.1 | length 5.5
  Top Layer w0.3: R23.2 R24.1 44.625,9.1 P6.11
NetR1_2: R1.2 R2.1 U1.5 | length 8.9
  Top Layer w0.5: R1.2 R2.1 88.575,45.95 88.925,45.6 88.925,45.525 91.6,42.85 U1.5
NetR3_2: R3.2 R9.1 U3.2 | length 5.4
  Top Layer w0.5: U3.2 77.55,44.5 78.075,45.025 78.075,45.1 78.425,45.45 R9.1 78.575,45.45 78.925,45.1 78.925,45.025 80.05,43.9 80.15,43.9 R3.2
NetR21_1: R21.1 U7.1 | length 2.9
  Top Layer w0.3: R21.1 41.87,45.405 U7.1
NetR22_2: R22.2 U8.2 | length 49.6
  Top Layer w0.5: U8.2@16.04,14 15.933,14.107 15.933,15.367 14.3,17 12.5,17 10.317,19.183 10.317,44.087 12.23,46 14.357,48.127 21.92,48.127 22.5,48.707 R22.2
NetR25_1: R25.1 U7.4 | length 3.2
  Top Layer w0.3: R25.1 42.475,42.5 43.36,41.615 44.58,41.615 U7.4
NetR26_2: R26.2 U8.3 | length 47.1
  Top Layer w0.5: v1(13,18) 10.944,20.056 10.944,42.174 14.77,46 16.27,47.5 23,47.5 24,48.5 R26.2
  Bottom Layer w0.5: v1(13,18) 13,14.906 13.5,14.406 U8.3@13.5,14
PGEC: P2.5 U4.1 | length 24.9
  Top Layer w0.3: P2.5 16.84,8.66 18,7.5 20.19,7.5 20.65,7.96 20.65,9.575 21.5,10.425 24.781,10.425 25.558,11.202 27.627,11.202 28.925,12.5 28.925,16.8 30.975,18.85 U4.1
PGED: P2.4 U4.44 | length 19.5
  Top Layer w0.3: P2.4 21.232,10.852 24.604,10.852 25.381,11.629 27.45,11.629 28.498,12.677 28.498,16.977 31.1,19.579 U4.44
SD_CARD_DETECT: R29.2 U4.13 | length 15.9
  Top Layer w0.3: U4.13 46.3,21.3 47,22 47,30.2 45.725,31.475 R29.2
SD_CARD_PROTECT: R24.2 U4.12 | length 14.1
  Top Layer w0.3: U4.12 45.5,20.5 46.5,19.5 46.5,12.775 44.775,11.05 44.775,11.025 44.525,10.775 R24.2
SD_CLK: R18.2 U4.22 U6.4 | length 20.7
  Top Layer w0.3: U4.22 43.469,28.5 44.173,29.204 44.173,35.009 44.79,35.626 49.623,35.626 50.581,34.668 50.581,34.194 R18.2 50.975,34.2 53,34.2 53.5,33.7 53.5,32.775 53.775,32.5 U6.4
SD_CS: R12.2 U4.24 U5.1 | length 33.4
  Top Layer w0.3: U4.24 39.95,30.979 40.771,31.8 41.096,31.8 43.319,34.023 43.319,35.363 44.436,36.48 49.976,36.48 50.53,35.927 61.677,35.927 63.025,34.579 63.025,34.25 R12.2 63.469,34.194 65.506,34.194 66,33.7 66,32.775 66.275,32.5 U5.1
SD_MISO: R19.2 U4.21 U6.1 | length 19.1
  Top Layer w0.3: U4.21 42.439,27.739 43.312,27.739 44.6,29.027 44.6,34.833 44.967,35.199 49.446,35.199 50,34.645 50,33.275 50.5,32.775 50.525,32.775 R19.2@50.775,32.525 ; R19.2 R19.2@50.775,32.525 ; U6.1 51.5,33.5 51.025,33.025 51.025,32.775 R19.2@50.775,32.525
SD_MOSI: R17.2 U4.23 U5.4 | length 30.7
  Top Layer w0.3: U4.23 40.75,30.85 43.746,33.846 43.746,35.186 44.613,36.053 49.799,36.053 50.353,35.5 61.5,35.5 62.5,34.5 62.5,33.275 63,32.775 63.025,32.775 R17.2@63.275,32.525 ; R17.2 R17.2@63.275,32.525 ; U5.4 64,33.5 63.525,33.025 63.525,32.775 R17.2@63.275,32.525
SWITCH: R16.1 U4.11 | length 9
  Top Layer w0.3: R16.1 38.5,11.5 40.75,13.75 U4.11
UVP: R7.2 U4.25 | length 38.3
  Top Layer w0.3: U4.25 39.15,30.743 39.523,31.116 39.523,31.208 40.542,32.227 40.92,32.227 42.892,34.199 42.892,35.54 44.259,36.907 50.153,36.907 50.706,36.354 61.854,36.354 62.354,35.854 63.579,35.854 69.95,42.225 69.975,42.225 70.225,42.475 R7.2
Vin: C2.1 C3.2 C4.2 D1.1 F1.2 R1.1 R3.1 U1.7 | length 38.1
  Top Layer w0.5: R3.1 80.5,47.464 82.036,49 83.075,49 F1.2 83.925,49 84.75,49 85.875,47.875 ; C3.2 C3.2@88.125,39.025 ; D1.1 87.5,48.4 86.975,47.875 85.875,47.875 ; U1.7 90.827,37.865 90.75,37.788 90.75,37.75 90,37 90,36.3 89.623,35.923 87.652,35.923 87.025,36.55 86.9,36.55 86.575,36.875 C4.2 86.575,39.35 85.5,40.425 85.5,43.125 86.425,44.05 86.075,44.4 86.075,44.475 85.414,45.136 85.414,47.414 85.875,47.875
  Top Layer w1: D1.1 91.45,48.9 92.35,48 C2.1
pads on no net: P2.6 P4.0 P5.0 P6.8 P6.9 S1.0 U3.4 U3.5 U4.2 U4.3 U4.4 U4.5 U4.8 U4.14 U4.15 U4.20 U4.27 U4.38 U4.41 U4.42 U4.43 U8.0 U8.5

## Polygon pours and split planes (outlines as drawn)
GND on Bottom Layer "GND_L02_P007" (solid, remove dead copper, pour order 7): 10,2 10,5 ccw(c5,5) 5,10 2,10 cw(c2,12) 0,12 0,49 cw(c2,49) 2,51 5,51 ccw(c5,56) 10,56 10,59 cw(c12,59) 12,61 12.008,60.992 89,60.992 89,61 cw(c89,59) 91,59 91,56 ccw(c96,56) 96,51 99,51 cw(c99,49) 101,49 101,12 cw(c99,12) 99,10 96,10 ccw(c96,5) 91,5 91,2 cw(c89,2) 89,0 12,0 cw(c12,2)
GND on Top Layer "GND_L01_P009" (solid, remove dead copper, pour order 9): 10,2 10,5 ccw(c5,5) 5,10 2,10 cw(c2,12) 0,12 0,49 cw(c2,49) 2,51 5,51 ccw(c5,56) 10,56 10,59 cw(c12,59) 12,61 12.008,60.992 89,60.992 89,61 cw(c89,59) 91,59 91,56 ccw(c96,56) 96,51 99,51 cw(c99,49) 101,49 101,12 cw(c99,12) 99,10 96,10 ccw(c96,5) 91,5 91,2 cw(c89,2) 89,0 12,0 cw(c12,2)

## Other copper
Top Layer:
  pour cut-out: 84,2.5 85.5,2.5 85.5,1.5 84,1.5
  pour cut-out: 77.5,5 80.5,5 80.5,2 77.5,2
  pour cut-out: 92,31 92,28 95,28 95,31

## Silkscreen, mask and mechanical layers (free items; w line width, h text height)
Top Overlay:
  drawing of 28 lines, arcs and shapes, not listed
  text "GND" at 9,52 h1.5
  text "RX" at 12.5,52 h1.5
  text "TX" at 15,52 h1.5
  text "-" at 74,47.75 h6
  text "+" at 78.75,47.25 h6
  text "004-H-01-00" at 27,44.5 h2
  text "SD Logger" at 27,42.75 h2
  text "VCC" at 10,41.5 h1.5 r90
  text "RX" at 12.5,41.5 h1.5 r90
  text "TX" at 15.5,41.5 h1.5 r90
  text "GND" at 18,41.5 h1.5 r90
  text ".print_Date" at 27,41 h2
  text "GND" at 10.5,18.5 h1.5 r270
  text "TX" at 13,18.5 h1.5 r270
  text "RX" at 15.5,18.5 h1.5 r270
  text "PPS" at 18,18.5 h1.5 r270
  text "VCC" at 7.5,18.467 h1.5 r270
Board Outline:
  lines w0.2: 12,61 ccw(c12,59) 10,59 10,56 cw(c5,56) 5,51 2,51 ccw(c2,49) 0,49 0,12 ccw(c2,12) 2,10 5,10 cw(c5,5) 10,5 10,2 ccw(c12,2) 12,0 89,0 ccw(c89,2) 91,2 91,5 cw(c96,5) 96,10 99,10 ccw(c99,12) 101,12 101,49 ccw(c99,49) 99,51 96,51 cw(c96,56) 91,56 91,59 ccw(c89,59) 89,61 ; 12.008,60.992 89,60.992